# Altium PCB QCopterMV-Expand2_Pcb.PcbDoc
Units mil, origin at the board's own origin, x right, y up, seen from the top; angles counter-clockwise.
Board outline 1800 x 800 mil, 2 copper layers (Top Layer, Bottom Layer), stack 46.457 mil thick; 4 components, 35 nets, 74 pads, 0 vias.
Unrouted connection lines stored in the file: 1.
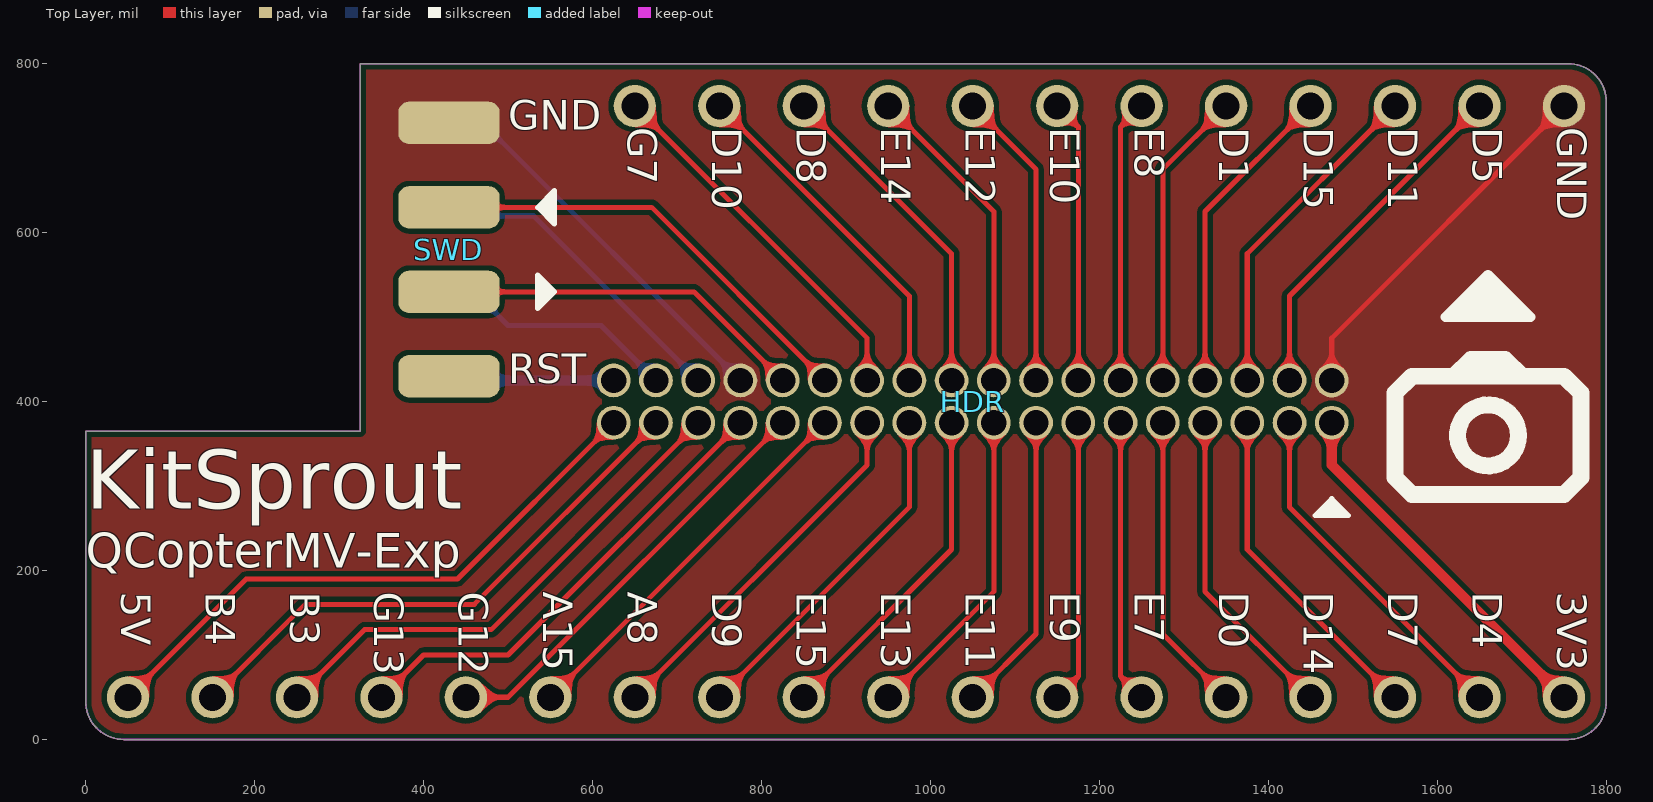
[diagram p0: Top Layer view]
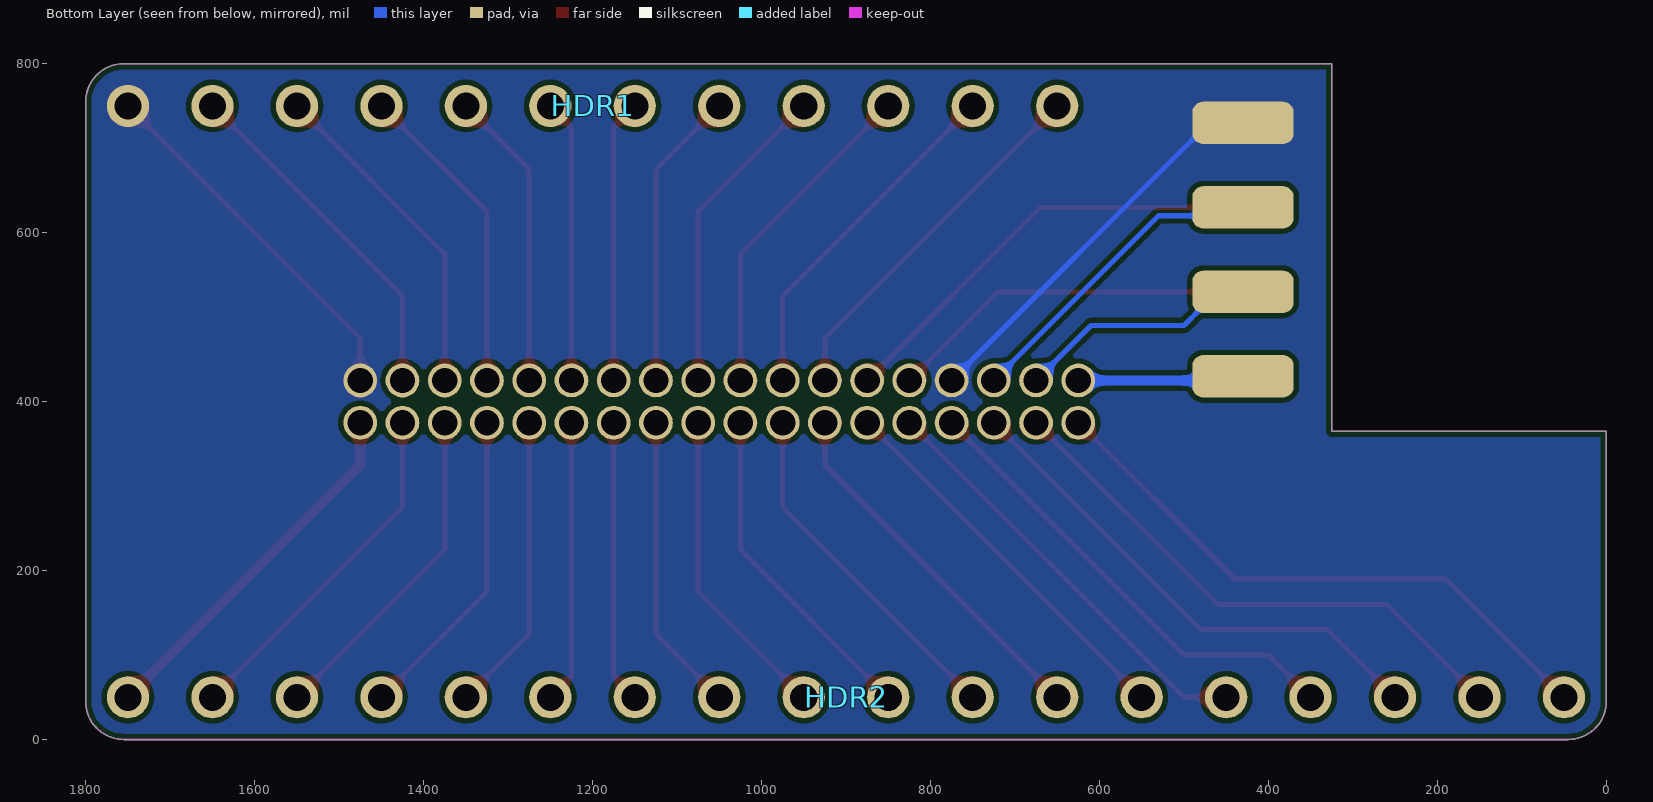
[diagram p1: Bottom Layer view, seen from below]

## Layer stack, top to bottom
Top Solder: solder mask 0.3937, Solder Resist, Dk 3.5
Top Layer: signal copper 1.378
Dielectric1: dielectric 43.7008, FR-4, Dk 4.8
Bottom Layer: signal copper 1.378
Bottom Solder: solder mask 0.3937, Solder Resist, Dk 3.5

## Board outline
0,45 ccw(c45,45) 45,0 1755,0 ccw(c1755,45) 1800,45 1800,755 ccw(c1755,755) 1755,800 325,800 325,365 0,365

## Design rules (kind name [scope] priority, off if disabled: settings)
Clearance ClearancePolygon [InPolygon] p1: gap=6
Clearance [All] p2: gap=6
ComponentClearance [All] p1: gap=0 collisioncheckmode=3 verticalgap=0 showdistances=FALSE
Height [All] p1: minheight=0 maxheight=5000 prefheight=500
HoleToHoleClearance [All] p1: gap=6 allowstackedmicrovias=TRUE
MinimumSolderMaskSliver [All] p1: minsoldermaskwidth=6
PlaneConnect [All] p1: planeconnectstyle=Direct reliefexpansion=20 reliefentries=4 reliefconductorwidth=20 reliefairgap=10
PolygonConnect [All] p1: connectstyle=Direct reliefconductorwidth=20 reliefentries=4 polygonreliefangle="90 Angle" airgapwidth=10
RoutingVias [All] p1: holewidth=12 width=20 viastyle="Through Hole" minholewidth=12 minwidth=20 maxholewidth=100 maxwidth=200
SilkToSilkClearance [All] p1: silktosilkclearance=0
SilkToSolderMaskClearance SilkscreenOverComponentPads [IsPad] p1: minsilkscreentomaskgap=1 clearancetoexposedcopper=TRUE
SolderMaskExpansion [All] p1: expansion=0
Width [All] p1: maxlimit=30 minlimit=6 preferedwidth=10
23 further rules are at their usual default settings.

## Components (designator, comment, footprint, x,y, rotation, side; value= is the part's Value field where it differs from the comment)
HDR "HDR2x18_1.27" HDR2x18_1.27_180 1475,425 r270 top
HDR1 "HDR1x12_2.54T" HDR1X12_2.54_180 1750,750 r90 bottom
HDR2 "HDR1x18_2.54" HDR1X18_2.54_180 1750,50 r90 bottom
SWD "HDR2x4_2.54" HDR2X4_2.54_180HF 430,430 r180 top

## Footprints (in the part's own frame and the unit in brackets; to place one, negate y for a bottom-side part, rotate by r counter-clockwise, add the part's x,y. Pads: shape width x height; smd on the part's side, far side on the other; paste and mask are expansions set on the pad)
HDR1X12_2.54_180 [mil]
  round 50 hole 32: 1(0,0) 2(0,-100) 3(0,-200) 4(0,-300) 5(0,-400) 6(0,-500) 7(0,-600) 8(0,-700) 9(0,-800) 10(0,-900) 11(0,-1000) 12(0,-1100)
  body extent -49,-1150 49,50, height 323
HDR1X18_2.54_180 [mil]
  round 50 hole 32: 1(0,0) 2(0,-100) 3(0,-200) 4(0,-300) 5(0,-400) 6(0,-500) 7(0,-600) 8(0,-700) 9(0,-800) 10(0,-900) 11(0,-1000) 12(0,-1100) 13(0,-1200) 14(0,-1300) 15(0,-1400) 16(0,-1500) 17(0,-1600) 18(0,-1700)
  body extent -49,-1750 49,50, height 323
HDR2X4_2.54_180HF [mil]
  rrect50% 120x50 smd: 1(0,0) 3(0,-100) 5(0,-200) 7(0,-300)
  rrect50% 120x50 smd far side: 2(0,0) 4(0,-100) 6(0,-200) 8(0,-300)
  body extent -36,-355 425,55, height 76
HDR2x18_1.27_180 [mil]
  round 40 hole 30: 1(0,0) 2(50,0) 3(0,-50) 4(50,-50) 5(0,-100) 6(50,-100) 7(0,-150) 8(50,-150) 9(0,-200) 10(50,-200) 11(0,-250) 12(50,-250) 13(0,-300) 14(50,-300) 15(0,-350) 16(50,-350) 17(0,-400) 18(50,-400) 19(0,-450) 20(50,-450) 21(0,-500) 22(50,-500) 23(0,-550) 24(50,-550) 25(0,-600) 26(50,-600) 27(0,-650) 28(50,-650) 29(0,-700) 30(50,-700) 31(0,-750) 32(50,-750) 33(0,-800) 34(50,-800) 35(0,-850) 36(49.99,-850)
  body extent -73,-875 123,25, height 210

## Part data
HDR HDR1 HDR2 SWD: "Header"

## Nets (pads, with @x,y where several pads share a name; then routed paths per layer and width w, separated by ;. In a path a pad name is that pad's centre, name@x,y a point inside that pad or via, vN(x,y) a via of type N, cw(c..) or ccw(c..) an arc to the next point about the centre after c; other vN are vias at no path point)
3V3: HDR2.1 HDR.2 HDR.35 SWD.2 | length 636
  Top Layer w12: HDR.2 1475,325 HDR2.1
  Bottom Layer w6: SWD.2 SWD.2@435,425
  Bottom Layer w12: SWD.2@435,425 HDR.35
5V: HDR2.18 HDR.36 | length 709.6
  Top Layer w6: HDR2.18 190,190 440,190 HDR.36
CS: HDR2.3 HDR.6 | length 397.5
  Top Layer w6: HDR.6 1375,225 HDR2.3
D0: HDR2.4 HDR.8 | length 376.8
  Top Layer w6: HDR.8 1325,175 HDR2.4
D1: HDR1.4 HDR.7 | length 376.8
  Top Layer w6: HDR.7 1325,625 HDR1.4
D2: HDR2.5 HDR.10 | length 356.1
  Top Layer w6: HDR.10 1275,125 HDR2.5
D3: HDR1.5 HDR.9 | length 356.1
  Top Layer w6: HDR.9 1275,675 HDR1.5
D4: HDR2.6 HDR.12 | length 335.4
  Top Layer w6: HDR.12 1225,75 HDR2.6
D5: HDR1.6 HDR.11 | length 335.4
  Top Layer w6: HDR.11 1225,725 HDR1.6
D6: HDR2.7 HDR.14 | length 335.4
  Top Layer w6: HDR2.7 1175,75 HDR.14
D7: HDR1.7 HDR.13 | length 335.4
  Top Layer w6: HDR1.7 1175,725 HDR.13
D8: HDR2.8 HDR.16 | length 356.1
  Top Layer w6: HDR2.8 1125,125 HDR.16
D9: HDR1.8 HDR.15 | length 356.1
  Top Layer w6: HDR1.8 1125,675 HDR.15
D10: HDR2.9 HDR.18 | length 376.8
  Top Layer w6: HDR2.9 1075,175 HDR.18
D11: HDR1.9 HDR.17 | length 376.8
  Top Layer w6: HDR1.9 1075,625 HDR.17
D12: HDR2.10 HDR.20 | length 397.5
  Top Layer w6: HDR2.10 1025,225 HDR.20
D13: HDR1.10 HDR.19 | length 397.5
  Top Layer w6: HDR1.10 1025,575 HDR.19
D14: HDR2.11 HDR.22 | length 418.2
  Top Layer w6: HDR2.11 975,275 HDR.22
D15: HDR1.11 HDR.21 | length 418.2
  Top Layer w6: HDR1.11 975,525 HDR.21
E.IO1: HDR2.17 HDR.34 | length 659.6
  Top Layer w6: HDR2.17 260,160 460,160 HDR.34
E.IO2: HDR2.16 HDR.32 | length 609.6
  Top Layer w6: HDR2.16 330,130 480,130 HDR.32
E.IO3: HDR2.15 HDR.30 | length 559.6
  Top Layer w6: HDR2.15 400,100 500,100 HDR.30
E.IO4: HDR2.14 HDR.28 | length 509.6
  Top Layer w6: HDR2.14 500,50 HDR.28
E.IO5: HDR2.13 HDR.26 | length 459.6
  Top Layer w6: HDR2.13 HDR.26
E.RX: HDR.27 SWD.3 | length 438.5
  Top Layer w6: SWD.3 720,530 HDR.27
E.TX: HDR.25 SWD.5 | length 529.9
  Top Layer w6: SWD.5 670,630 HDR.25
GND: HDR1.1 HDR.1 HDR.29 SWD.7 SWD.8 | length 910.2
  Top Layer w6: HDR.1 1475,475 HDR1.1
  Bottom Layer w6: SWD.8 470,730 HDR.29
JRST: SWD.1
LIG: HDR2.12 HDR.24 | length 438.9
  Top Layer w6: HDR2.12 925,325 HDR.24
RD: HDR2.2 HDR.4 | length 418.2
  Top Layer w6: HDR.4 1425,275 HDR2.2
RS: HDR1.3 HDR.5 | length 397.5
  Top Layer w6: HDR.5 1375,575 HDR1.3
RST: HDR1.12 HDR.23 | length 438.9
  Top Layer w6: HDR1.12 925,475 HDR.23
SWC: HDR.31 SWD.6 | length 379.9
  Bottom Layer w6: SWD.6 460,630 470,620 530,620 HDR.31
SWD: HDR.33 SWD.4 | length 288.5
  Bottom Layer w6: SWD.4 450,510 480,510 500,490 610,490 HDR.33
WR: HDR1.2 HDR.3 | length 418.2
  Top Layer w6: HDR.3 1425,525 HDR1.2

## Polygon pours and split planes (outlines as drawn)
no net on Keep-Out Layer "keepout" (none, remove dead copper): 0,45 ccw(c45,45) 45,0 1755,0 ccw(c1755,45) 1800,45 1800,755 ccw(c1755,755) 1755,800 325,800 325,365 0,365
GND on Top Layer "GND_L01_P001" (solid, remove dead copper, pour order 1): 0,45 ccw(c45,45) 45,0 1755,0 ccw(c1755,45) 1800,45 1800,755 ccw(c1755,755) 1755,800 325,800 325,365 0,365
GND on Bottom Layer "GND_L02_P000" (solid, remove dead copper, pour order 0): 0,45 ccw(c45,45) 45,0 1755,0 ccw(c1755,45) 1800,45 1800,755 ccw(c1755,755) 1755,800 325,800 325,365 0,365

## Silkscreen, mask and mechanical layers (free items; w line width, h text height)
Top Overlay:
  circle w20: c1660,360 r36.06
  region: 555,530 535,510 535,550
  region: 535,630 555,650 555,610
  region: 1475,285 1495,265 1455,265
  region: 1660,550 1610,500 1710,500
  lines w6: 535,510 555,530 535,550 535,510 ; 535,630 555,650 555,610 535,630 ; 1455,265 1495,265 1475,285 1455,265
  lines w12: 1610,500 1660,550 1710,500 1610,500
  lines w20: 1620,430 1640,450 1680,450 1700,430 ; 1550,310 1570,290 1750,290 1770,310 1770,410 1750,430 1570,430 1550,410 1550,310
  text "G7" at 630,725 h60 r270
  text "D10" at 730,725 h60 r270
  text "D8" at 830,725 h60 r270
  text "E14" at 930,725 h60 r270
  text "E12" at 1030,725 h60 r270
  text "E10" at 1130,725 h60 r270
  text "E8" at 1230,725 h60 r270
  text "D1" at 1330,725 h60 r270
  text "D15" at 1430,725 h60 r270
  text "D11" at 1530,725 h60 r270
  text "D5" at 1630,725 h60 r270
  text "GND" at 1730,725 h60 r270
  text "GND" at 500,710 h60
  text "RST" at 500,410 h60
  text "KitSprout" at 0,250 h120
  text "QCopterMV-Exp" at 0,190 h70
  text "5V" at 30,175 h60 r270
  text "B4" at 130,175 h60 r270
  text "B3" at 230,175 h60 r270
  text "G13" at 330,175 h60 r270
  text "G12" at 430,175 h60 r270
  text "A15" at 530,175 h60 r270
  text "A8" at 630,175 h60 r270
  text "D9" at 730,175 h60 r270
  text "E15" at 830,175 h60 r270
  text "E13" at 930,175 h60 r270
  text "E11" at 1030,175 h60 r270
  text "E9" at 1130,175 h60 r270
  text "E7" at 1230,175 h60 r270
  text "D0" at 1330,175 h60 r270
  text "D14" at 1430,175 h60 r270
  text "D7" at 1530,175 h60 r270
  text "D4" at 1630,175 h60 r270
  text "3V3" at 1730,175 h60 r270
Mechanical 1:
  the board outline again, w2